# Altium PCB USB-ISO.PcbDoc
Units mm, origin at the board's own origin, x right, y up, seen from the top; angles counter-clockwise.
Board outline 18 x 29 mm, 2 copper layers (Top Layer, Bottom Layer); 19 components, 16 nets, 70 pads, 6 vias.
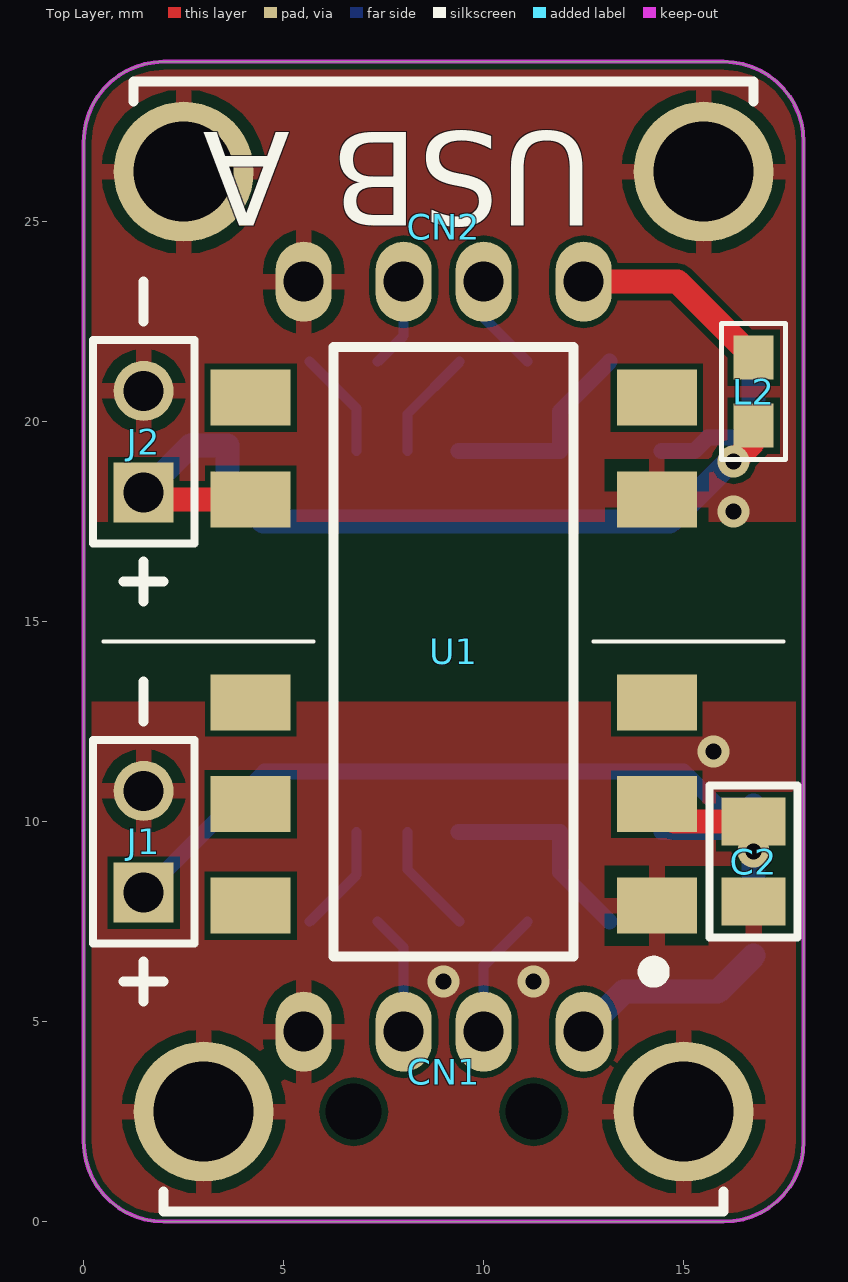
[diagram p0: Top Layer view]
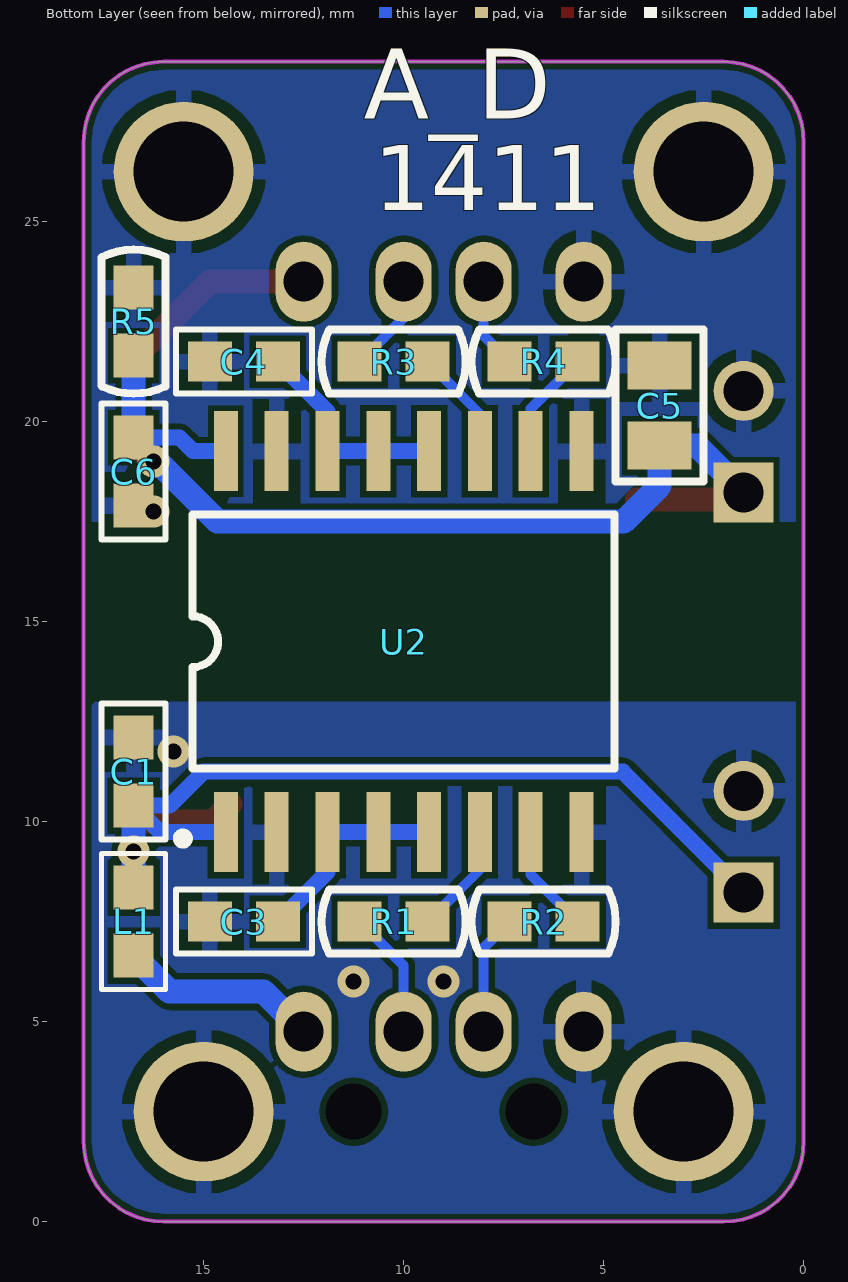
[diagram p1: Bottom Layer view, seen from below]

## Layer stack, top to bottom
Top Solder: solder mask 0.0102, Solder Resist, Dk 3.5
Top Layer: signal copper 0.0356
Dielectric1: dielectric 0.32, FR-4, Dk 4.8
Bottom Layer: signal copper 0.0356
Bottom Solder: solder mask 0.0102, Solder Resist, Dk 3.5

## Board outline
0,2 ccw(c2,2) 2,0 16,0 ccw(c16,2) 18,2 18,27 ccw(c16,27) 16,29 2,29 ccw(c2,27) 0,27

## Design rules (kind name [scope] priority, off if disabled: settings)
Clearance [All] p1: gap=0.15 ignorepadtopadclearanceinfootprint=FALSE except(0: Arc-Hole Track-Hole SMDPad-Hole THPad-Hole Via-Hole Fill-Hole Poly-Hole Region-Hole Text-Hole)
ComponentClearance [All] p1: gap=0.25 collisioncheckmode=3 verticalgap=0.25 showdistances=FALSE
DiffPairsRouting [All] p1: maxlimit=0.254 minlimit=0.254 mostfreqgap=0.254 toplayer_minwidth=0.381 toplayer_maxwidth=0.381 toplayer_prefwidth=0.381 bottomlayer_minwidth=0.381 bottomlayer_maxwidth=0.381 bottomlayer_prefwidth=0.381 maxuncoupledlength=12
Height [All] p1: minheight=0 maxheight=25 prefheight=25
HoleSize [All] p1: absolutevalues=TRUE maxlimit=6 minlimit=0.3 maxpercent=80.000 minpercent=20.000
HoleToHoleClearance [All] p1: gap=0.25 allowstackedmicrovias=TRUE
MinimumSolderMaskSliver [All] p1 off: minsoldermaskwidth=0.254
PlaneClearance [All] p1: clearance=0.5
PlaneConnect [All] p1: planeconnectstyle=Relief reliefexpansion=0.5 reliefentries=4 reliefconductorwidth=0.25 reliefairgap=0.25
PolygonConnect [All vs (InPadClass('All Pads'))] p1: connectstyle=Relief reliefconductorwidth=0.4 reliefentries=4 polygonreliefangle="90 Angle" airgapwidth=0.3
PolygonConnect PolygonConnect_Via [All] p2: connectstyle=Direct reliefconductorwidth=0.254 reliefentries=4 polygonreliefangle="90 Angle" airgapwidth=0.254
RoutingCorners [All] p1: cornerstyle=45-Degree minsetback=1.5 maxsetback=3.5
RoutingVias [All] p1: holewidth=0.6 width=1.2 viastyle="Through Hole" minholewidth=0.3 minwidth=0.6 maxholewidth=1 maxwidth=2
SMDEntry [All] p1: side=TRUE corner=TRUE anyangle=TRUE
SilkToSilkClearance [All] p1 off: silktosilkclearance=0.254
SilkToSolderMaskClearance [IsPad] p1 off: minsilkscreentomaskgap=0.254 clearancetoexposedcopper=TRUE
SolderMaskExpansion [All] p1: expansion=0.1
Width [All] p1: maxlimit=8 minlimit=0.2 preferedwidth=0.6
Width Width_TrackEnds [All] p2 off: maxlimit=0.25 minlimit=0.25 preferedwidth=0.25 checkconnectedcopper=TRUE
19 further rules are at their usual default settings.

## Components (designator, comment, footprint, x,y, rotation, side; value= is the part's Value field where it differs from the comment)
C1 "Capacitor" C0603 16.75,11.25 r270 bottom value=0.1uF
C2 "Capacitor" C0805 16.75,9 r90 top value=10uF
C3 "Capacitor" C0603 13.995,7.5 r180 bottom value=0.1uF
C4 "Capacitor" C0603 13.995,21.5 r180 bottom value=0.1uF
C5 "Capacitor" C0805 3.6,20.4 r270 bottom value=10uF
C6 "Capacitor" C0603 16.75,18.75 r90 bottom value=0.1uF
CN1 "Text" DS1097 9,3 r0 top value=DS1097-B
CN2 "Text" DS1095 9,25.5 r180 top value=DS1095-B-R
J1 "Text" PLS-2 1.5,9.5 r90 top value=PLS-2
J2 "Text" PLS-2 1.5,19.5 r90 top value=PLS-2
L1 "FerriteBead" L0603 16.75,7.5 r90 bottom value=BLM18PG121SN1
L2 "FerriteBead" L0603 16.75,20.75 r90 top value=BLM18PG121SN1
R1 "Resistor" R0603 10.25,7.5 r180 bottom value=22
R2 "Resistor" R0603 6.5,7.5 r180 bottom value=22
R3 "Resistor" R0603 10.25,21.5 r180 bottom value=22
R4 "Resistor" R0603 6.5,21.5 r180 bottom value=22
R5 "Resistor" R0603 16.75,22.5 r270 bottom value=1k
U1 "AM1L-xxxxSH30-Series" AM1L-xxxxDH30-NZ-Series 9.25,14.25 r90 top value=AM1L-0505SH30-NZ
U2 "ADuMx160-Series" SO16W 10,14.5 r180 bottom locked value=ADUM3160BRWZ

## Footprints (in the part's own frame and the unit in brackets; to place one, negate y for a bottom-side part, rotate by r counter-clockwise, add the part's x,y. Pads: shape width x height; smd on the part's side, far side on the other; paste and mask are expansions set on the pad)
AM1L-xxxxDH30-NZ-Series [mm] "1 Watt 3kV ISO AIMTEC DC-DC Converter"
  rect 1.4x2 smd: 1(-6.35,-5.08) 2(-3.81,-5.08) 3(-1.27,-5.08) 5(3.81,-5.08) 6(6.35,-5.08) 7(6.35,5.08) 8(3.81,5.08) 9(-1.27,5.08) 10(-3.81,5.08) 12(-6.35,5.08)
  silkscreen extent -8.2,-5.2 7.62,3, body extent -7.62,-5.62 7.62,5.62, height 6.45
C0603 [mm] "1608M"
  rect 1.1x1 smd: 1(-0.85,0) 2(0.85,0)
  silkscreen extent -1.7,-0.8 1.7,0.8, body extent -0.8,-0.4 0.8,0.4, height 0.91
C0805 [mm] "2012M"
  rect 1.2x1.6 smd: 1(-1,0) 2(1,0)
  silkscreen extent -1.9,-1.1 1.9,1.1, body extent -1,-0.62 1,0.63, height 1.01
DS1095 [mm]
  oval 1.4x2 hole 1: 1(-3.5,2) 2(-1,2) 3(1,2) 4(3.5,2)
  round 3.5 hole 2.5: 5(-6.5,-0.75) 5(6.5,-0.75)
  silkscreen extent -7.75,-3 7.75,-2.5, body extent -8.12,-10.99 8.12,3.01, height 7.66
DS1097 [mm]
  round 0 hole 1.4: 0(-2.25,-0.25) 0(2.25,-0.25)
  oval 1.4x2 hole 1: 1(3.5,1.75) 2(1,1.75) 3(-1,1.75) 4(-3.5,1.75)
  round 3.5 hole 2.5: 5(-6,-0.25) 5(6,-0.25)
  silkscreen extent -7,-2.75 7,-2.25, body extent -6.3,-17.93 6.3,2, height 3.3
L0603 [mm] "1608M"
  rect 1.1x1 smd: 1(-0.85,0) 2(0.85,0)
  silkscreen extent -1.7,-0.8 1.7,0.8, body extent -0.8,-0.48 0.8,0.47, height 0.8
PLS-2 [mm]
  rect 1.5x1.5 hole 1: 1(-1.27,0)
  round 1.5 hole 1: 2(1.27,0)
  silkscreen extent -2.54,-1.27 2.54,1.27, body extent -2.54,-1.27 2.54,1.27, height 8.9
R0603 [mm] "1608M"
  rect 1.1x1 smd: 1(-0.85,0) 2(0.85,0)
  silkscreen extent -1.8,-0.8 1.8,0.8, body extent -0.8,-0.4 0.8,0.4, height 0.3
SO16W [mm] "Small Outline; 16 Leads; Body Width 7.5 mm; Pitch 1.27 mm"
  rect 0.6x2 smd: 1(-4.445,-4.762) 2(-3.175,-4.762) 3(-1.905,-4.763) 4(-0.635,-4.763) 5(0.635,-4.763) 6(1.905,-4.763) 7(3.175,-4.763) 8(4.445,-4.763) 9(4.445,4.762) 10(3.175,4.762) 11(1.905,4.763) 12(0.635,4.763) 13(-0.635,4.763) 14(-1.905,4.763) 15(-3.175,4.763) 16(-4.445,4.763)
  silkscreen extent -5.65,-5.05 5.27,3.18, body extent -5.21,-5.33 5.29,5.27, height 2.57

## Part data
C1 C3 C4 C6: library part GRM188R71C104KA01D, Dielectric Type=X7R, Manufacturer=Murata, Tolerance=±10%, Voltage=16V, Working Temperature Max=+125把, Working Temperature Min=-55把, Application Category=1, ID=131, Part Number=GRM188R71C104KA01D, Published=18.05.2010, Publisher=A_D, Type=Êîíäåíñàòîð
C2 C5: library part GRM219R60J106KE19D, Dielectric Type=X5R, Manufacturer=Murata, Tolerance=±20%, Voltage=6.3V, Working Temperature Max=+85把, Working Temperature Min=-55把, Application Category=1, ID=141, Part Number=GRM219R60J106KE19D, Published=18.05.2010, Publisher=A_D, Type=Êîíäåíñàòîð
CN1: library part DS1097-B, Limit Current=1.5A, Limit Voltage=30V, Manufacturer="Connfly Electronic Co., Ltd", Application Category=1, Connector Type=Male, Functional Analog="USB-AR, DS1097-W", ID=3, Interface="USB 2.0", Max Data Rate="480 mbps", Mount Type="Through hole", Part Number=DS1097-B, Pins=6, Published=13.08.2015, Publisher=A_D, Type=Âèëêà
CN2: library part DS1095-B-R, Limit Current=1.5A, Limit Voltage=30V, Manufacturer="Connfly Electronic Co., Ltd", Application Category=1, Connector Type=Female, ID=19, Interface="USB 2.0", Max Data Rate="480 mbps", Mount Type="Through hole", Part Number=DS1095-B-R, Pins=6, Published=07.03.2013, Publisher=A_D, Type=Ðîçåòêà
J1 J2: library part PLS-2, Limit Current=3A, Limit Voltage=250V, Resistance=15momh, Connector Type=Male, ID=1, Part Number=PLS-2, Pins=2, Pitch=2.54mm, Published=07.03.2013, Publisher=A_D, Surface Finish=Gold, Type=Âèëêà
L1 L2: library part BLM18PG121SN1, DC Resistance=0.05ohm, Inductor Type=EMIFIL, Manufacturer=Murata, Rated Current=2A, Working Temperature Max=+125把, Working Temperature Min=-55把, Application Category=1, ID=4, Impedance at 100Mhz=120ohm, Part Number=BLM18PG121SN1, Published=14.11.2014, Publisher=A_D, Type=酿铖皴朦
R1 R2 R3 R4: library part RC0603JR-0722RL, Limit Voltage=50V, Manufacturer=Yageo, Temperature Coefficient=100ppm, Tolerance=±5%, Total Power Dissipation=0.1W, Working Temperature Max=+155把, Working Temperature Min=-55把, Application Category=1, ID=29, Part Number=RC0603JR-0722RL, Published=24.03.2010, Publisher=A_D, Series Type=Thick-Film, Type=绣玷耱铕
R5: library part RC0603JR-071KL, Limit Voltage=50V, Manufacturer=Yageo, Temperature Coefficient=100ppm, Tolerance=±5%, Total Power Dissipation=0.1W, Working Temperature Max=+155把, Working Temperature Min=-55把, Application Category=1, Functional Analog=CR0603-JW-102E, ID=19, Part Number=RC0603JR-071KL, Published=24.03.2010, Publisher=A_D, Series Type=Thick-Film, Type=绣玷耱铕
U1: library part AM1L-0505SH30-NZ, Manufacturer=Aimtec, Output Current Max=±200mA, Output Current Min=±20mA, Output Voltage=+5V, Working Temperature Max=+85把, Working Temperature Min=-40把, Application Category=1, Efficiency=70%, Functional Analog=-, I-O Isolation=3kV, ID=2, Part Number=AM1L-0505SH30-NZ, Published=29.07.2015, Publisher=A_D, Supply Operation=+4.5…5.5V, Type=惕牮铖蹂爨
U2: library part ADUM3160BRWZ, Manufacturer="Analog Devices", Supply Current=8mA, Application Category=1, Data Rate=12Mbts, Forward Channels=2, Functional Analog=ADUM4160BRWZ, ID=1, Interface="USB 2.0", Opposite Channels=2, Part Number=ADUM3160BRWZ, Peak-to-peak Jitter=3ns, Published=29.07.2015, Publisher=A_D, Supply Operation=+4.5…5.5V, Type=惕牮铖蹂爨

## Via types
v1: diameter 0.8, hole 0.4, Top Layer to Bottom Layer, tented both sides, 6 vias

## Nets (pads, with @x,y where several pads share a name; then routed paths per layer and width w, separated by ;. In a path a pad name is that pad's centre, name@x,y a point inside that pad or via, vN(x,y) a via of type N, cw(c..) or ccw(c..) an arc to the next point about the centre after c; other vN are vias at no path point)
GND: C1.1 C2.1 C3.1 CN1.4 CN1.5 J1.2 U1.1 U2.2 U2.8
  other v1: 9,6 11.25,6 15.75,11.75
GNDO: C4.1 C5.1 C6.1 CN2.4 CN2.5 J2.2 R5.1 U1.5 U2.9 U2.15
  other v1: 16.25,17.75
NetCN1_1: CN1.1 L1.1 | length 5
  Bottom Layer w0.6: CN1.1 13.5,5.75 15.85,5.75 L1.1
NetCN1_2: CN1.2 R1.1 | length 3.2
  Bottom Layer w0.25: CN1.2 10,6.4 R1.1
NetCN1_3: CN1.3 R2.1 | length 3
  Bottom Layer w0.25: R2.1 8,6.85 CN1.3
NetCN2_1: CN2.1 L2.2 | length 5
  Top Layer w0.6: CN2.1 14.85,23.5 L2.2
NetCN2_2: CN2.2 R3.1 | length 2.5
  Bottom Layer w0.25: CN2.2 10,22.6 R3.1
NetCN2_3: CN2.3 R4.1 | length 2.3
  Bottom Layer w0.25: R4.1 8,22.15 CN2.3
NetR1_2: R1.2 U2.6 | length 2.8
  Bottom Layer w0.25: U2.6 8.095,8.805 R1.2
NetR2_2: R2.2 U2.7 | length 2.7
  Bottom Layer w0.25: R2.2 6.825,8.675 U2.7
NetR3_2: R3.2 U2.11 | length 2.8
  Bottom Layer w0.25: U2.11 8.095,20.195 R3.2
NetR4_2: R4.2 U2.10 | length 2.7
  Bottom Layer w0.25: R4.2 6.825,20.325 U2.10
VCC: C1.2 C2.2 J1.1 L1.2 U1.2 U2.1 | length 24.1
  Top Layer w0.6: U1.2 14.77,10 C2.2
  Bottom Layer w0.4: J1.1 4.52,11.25 15,11.25 15.85,10.4 C1.2 16.087,9.737 U2.1
  Bottom Layer w0.6: L1.2 v1(16.75,9.25) C1.2
VCCi: C3.2 U2.3 U2.4 U2.5 | length 5.3
  Bottom Layer w0.4: U2.5 U2.4 U2.3 11.905,8.745 C3.2@13.15,7.5
VCCO: C5.2 C6.2 J2.1 L2.1 R5.2 U1.8 U2.16 | length 26.3
  Top Layer w0.6: J2.1 1.67,18.06 U1.8 ; v1(16.25,19) 16.75,19.5 L2.1
  Bottom Layer w0.4: U2.16 15.262,19.262 15.6,19.6 C6.2
  Bottom Layer w0.6: J2.1 2.67,19.4 C5.2 3.6,18.4 4.5,17.5 14.65,17.5 C6.2 R5.2
VCCOi: C4.2 U2.12 U2.13 U2.14 | length 5.3
  Bottom Layer w0.4: U2.12 U2.13 U2.14 11.905,20.255 C4.2@13.15,21.5
pads on no net: CN1.0 U1.3 U1.6 U1.7 U1.9 U1.10 U1.12

## Polygon pours and split planes (outlines as drawn)
GNDO on Top Layer "GNDO_T" (solid, remove dead copper, pour order 4): 0,17.5 0,29 18,29 18,17.5
GND on Top Layer "GNDI_T" (solid, remove dead copper, pour order 2): 0,13 0,0 18,0 18,13
GNDO on Bottom Layer "GNDO_B" (solid, remove dead copper, pour order 6): 0,29 18,29 18,17.5 0,17.5
GND on Bottom Layer "GNDI_B" (solid, remove dead copper, pour order 8): 18,0 18,13 0,13 0,0

## Keep-outs
Top Layer:
  the board outline again, w0.1
Bottom Layer:
  the board outline again, w0.1

## Silkscreen, mask and mechanical layers (free items; w line width, h text height)
Top Overlay:
  lines w0.1: 0.5,14.5 5.75,14.5 ; 12.75,14.5 17.5,14.5
  lines w0.25: 1,6 2,6 ; 1,16 2,16 ; 1.5,5.5 1.5,6.5 ; 1.5,12.5 1.5,13.5 ; 1.5,15.5 1.5,16.5 ; 1.5,22.5 1.5,23.5
Bottom Overlay:
  text "A_D" at 11,27 h3
  text "1411" at 10.75,24.75 h2.8
1 - Board Outline:
  the board outline again, w0.1
11 - Dementions (Top):
  lines w0.1: 0,-15 0,-6 50,-6 50,-15 0,-15
  lines w0.254: -3.008,1.524 -2.5,0 ; -3.008,27.476 -2.5,29 ; -2.754,0 -2.246,0 ; -2.754,29 -2.246,29 ; -2.5,9.396 -2.5,0 ; -2.5,19.604 -2.5,29 ; -1.992,1.524 -2.5,0 ; -1.992,27.476 -2.5,29 ; 0,-2.754 0,-2.246 ; 1.524,-3.008 0,-2.5 ; 1.524,-1.992 0,-2.5 ; 4.023,-2.5 0,-2.5 ; 13.977,-2.5 18,-2.5 ; 16.476,-3.008 18,-2.5 ; 16.476,-1.992 18,-2.5 ; 18,-2.754 18,-2.246
  text "29 (mm)" at -1.586,9.65 h1.52 r90
  text "18 (mm)" at 4.277,-3.414 h1.52
  text "Printed on:" at 1,-8 h3
  text ".ComputerName" at 13,-8 h3
  text "File Name:" at 1,-11 h3
  text ".Pcb_File_Name_No_Path" at 13,-11 h3
  text "Date:" at 1,-14 h3
  text ".Print_Date" at 7,-14 h3
  text "Time:" at 24,-14 h3
  text ".Print_Time" at 30,-14 h3

## Text inside footprints (layer, text, board x,y; h text height)
CN2: Top Overlay "USB A" at 12.75,28 h4 r180